# Altium PCB atmusic.PcbDoc
Units mm, origin at the board's own origin, x right, y up, seen from the top; angles counter-clockwise.
Board outline 15.8 x 26.78 mm, 2 copper layers (Top Layer, Bottom Layer); 11 components, 11 nets, 52 pads, 12 vias.
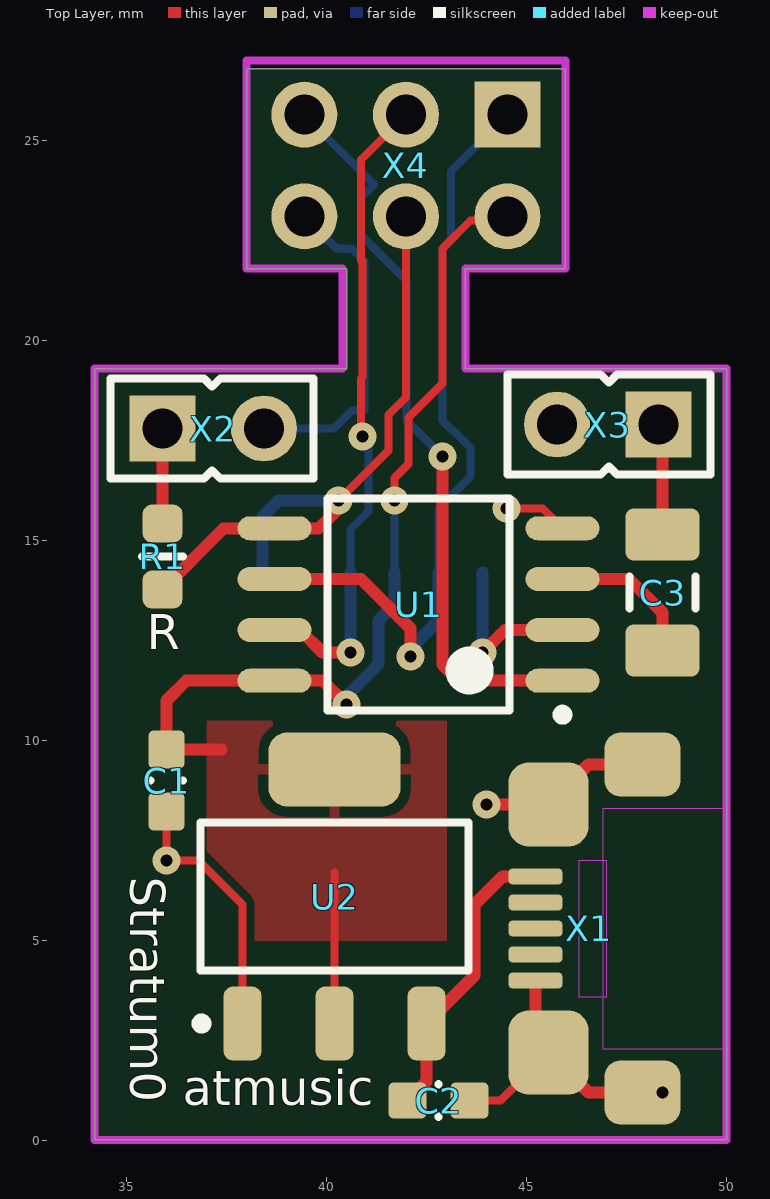
[diagram p0: Top Layer view]
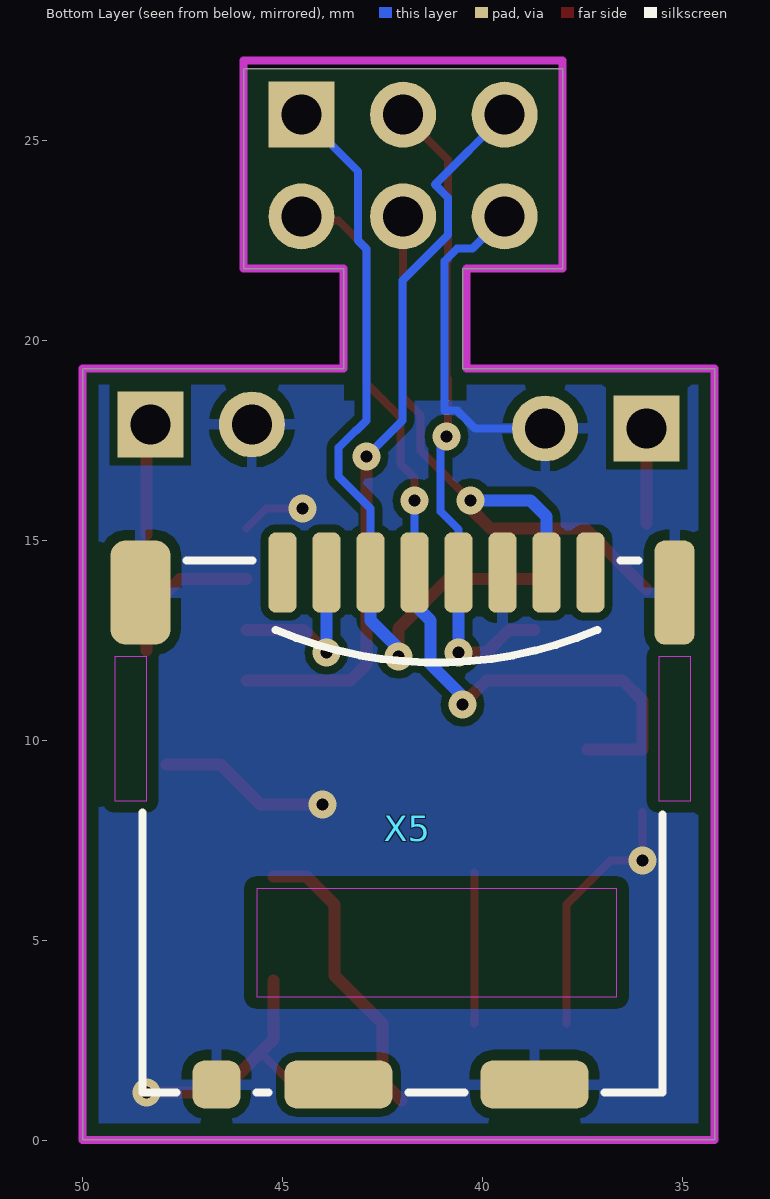
[diagram p1: Bottom Layer view, seen from below]

## Layer stack, top to bottom
Top Solder: solder mask 0.0102, Solder Resist, Dk 3.5
Top Layer: signal copper 0.0356
Dielectric1: dielectric 0.32, FR-4, Dk 4.8
Bottom Layer: signal copper 0.0356
Bottom Solder: solder mask 0.0102, Solder Resist, Dk 3.5

## Board outline
34.2,0.018 34.2,19.3 40.5,19.3 40.5,21.8 38,21.8 38,26.8 45.97,26.8 45.97,21.8 43.47,21.8 43.47,19.3 50,19.3 50,0.018

## Design rules (kind name [scope] priority, off if disabled: settings)
AcuteAngle [All] p1 off: minimum=6.00000000000000E+0001 checktracksonly=FALSE
Clearance Clearance_keepout [IsKeepout] p1: gap=0.3
Clearance [All] p2: gap=0.2
ComponentClearance [All] p1: gap=0.254 collisioncheckmode=3 verticalgap=0.01 showdistances=FALSE
FabricationTestPointUsage TestPointUsage [All] p1: valid=0 allowmultiple=FALSE
FabricationTestpoint Testpoint [All] p1: side=3 testpointundercomponent=TRUE minsize=1.016 maxsize=2.54 preferedsize=1.524 minholesize=0 maxholesize=1.016 preferedholesize=0.813 testpointgrid=0.025 allowsidetop=TRUE allowsidebottom=TRUE usegrid=TRUE gridtolerance=0
HoleSize [All] p1: absolutevalues=TRUE maxlimit=5 minlimit=0.3 maxpercent=80.000 minpercent=20.000
PolygonConnect PolygonConnect_4 [All vs IsNamedPolygon('TL_GND')] p1: connectstyle=Direct reliefconductorwidth=0.254 reliefentries=4 polygonreliefangle="90 Angle" airgapwidth=0.254
PolygonConnect PolygonConnect_3 [All vs IsNamedPolygon('TL_GND_COOLING')] p2: connectstyle=Direct reliefconductorwidth=0.254 reliefentries=4 polygonreliefangle="90 Angle" airgapwidth=0.254
PolygonConnect PolygonConnect_2 [All vs IsNamedPolygon('TL_GND_LDO5V')] p3: connectstyle=Direct reliefconductorwidth=0.254 reliefentries=4 polygonreliefangle="90 Angle" airgapwidth=0.254
PolygonConnect PolygonConnect_1 [All vs IsNamedPolygon('TL_GND_5Vow')] p4: connectstyle=Direct reliefconductorwidth=0.254 reliefentries=4 polygonreliefangle="90 Angle" airgapwidth=0.254
PolygonConnect PolygonConnect_VIA [All vs IsVIa] p5: connectstyle=Direct reliefconductorwidth=0.254 reliefentries=4 polygonreliefangle="90 Angle" airgapwidth=0.254
PolygonConnect [All] p6: connectstyle=Relief reliefconductorwidth=0.254 reliefentries=4 polygonreliefangle="90 Angle" airgapwidth=0.254
RoomDefinition atmusic [InComponentClass('atmusic')] p1: confinementstyle=ConfineOut formatcopy=TRUE lockcomponents=FALSE outline 51.12,1.52 60.32,1.52 60.32,11.72 51.12,11.72
RoutingVias [All] p1: holewidth=0.3 width=0.7 viastyle="Through Hole" minholewidth=0.3 minwidth=0.7 maxholewidth=0.5 maxwidth=0.9
SilkToSolderMaskClearance SilkscreenOverComponentPads [IsPad] p1: minsilkscreentomaskgap=0.254 clearancetoexposedcopper=TRUE
SolderMaskExpansion [All] p1: expansion=0.102
UnpouredPolygon [All] p1: allowunpoured=FALSE
Width [All] p1: maxlimit=0.5 minlimit=0.2 preferedwidth=0.3 minimp=50.000000 maximp=50.000000 favimp=50.000000
24 further rules are at their usual default settings.

## Components (designator, comment, footprint, x,y, rotation, side; value= is the part's Value field where it differs from the comment)
C1 "100n" CAPC1608X06N 36,9 r90 top
C2 "100n" CAPC1608X06N 42.8,1 r180 top
C3 "10u" CAPC3216X07N 48.4,13.7 r270 top
R1 "1k .. 47k" RESC1608X06N 35.9,14.6 r270 top
U1 "ATTINY 85" SOIC127P800X216-8N 42.3,13.4 r180 top
U2 "AMS1117-3.3" SOT230P700X180-4N 40.2,6.1 r90 top
X1 "ZX62R-B-5P" ZX62R-B-5P 47.9,5.3 r90 top
X2 "SL11-124_2_Z" Fischer_SL11-124_2_x 34.6,17.8 r0 top
X3 "SL11-124_2_Z" Fischer_SL11-124_2_x 49.6,17.9 r180 top
X4 "WSL 6G" WSL_6G 42,24.4 r180 top
X5 "DM3 microSD-CardHolder" DM3CS-SF 41.8,14.2 r0 bottom

## Footprints (in the part's own frame and the unit in brackets; to place one, negate y for a bottom-side part, rotate by r counter-clockwise, add the part's x,y. Pads: shape width x height; smd on the part's side, far side on the other; paste and mask are expansions set on the pad)
CAPC1608X06N [mm] "Chip Capacitor, 2-Leads, Body 1,6x0,8mm, IPC Medium Density"
  rrect30% 0.95x0.9 smd: 1(-0.775,0) 2(0.775,0)
  silkscreen extent 0,-0.41 0,0.41, body extent -0.85,-0.45 0.85,0.45, height 0.6
CAPC3216X07N [mm] "Chip Capacitor, 2-Leads, Body 3,2x1,6mm, IPC Medium Density"
  rrect30% 1.3x1.85 smd: 1(-1.45,0) 2(1.45,0)
  silkscreen extent -0.4,-0.82 0.4,0.82, body extent -1.7,-0.9 1.7,0.9, height 0.7
DM3CS-SF [mm] "DM3CS-SF, Hinge, Push -Pull microSD Card-Holder"
  rrect50% 0.7x2 smd: 1(3.2,0) 2(2.1,0) 3(1,0) 4(-0.1,0) 5(-1.2,0) 6(-2.3,0) 7(-3.4,0) 8(-4.5,0)
  rrect50% 2.7x1.2 smd: CD(1.8,12.8) COM(-3.1,12.8)
  rrect50% 1x2.6 smd: COM(-6.6,0.5)
  rrect50% 1.2x1.2 smd: COM(4.85,12.8)
  rrect50% 1.5x2.6 smd: COM(6.75,0.5)
  Top Layer keep-out region: 6.6,5.7 6.6,2.1 7.4,2.1 7.4,5.7
  Top Layer keep-out region: -7,5.7 -7,2.1 -6.2,2.1 -6.2,5.7
  Top Layer keep-out region: -5.15,10.6 -5.15,7.9 3.85,7.9 3.85,10.6
  silkscreen extent -6.3,-0.3 6.7,13, body extent -6.7,-2 7.1,13.42, height 17
Fischer_SL11-124_2_x [mm] "Präzisionssteckerleiste 2 polig"
  rect 1.65x1.65 hole 1: 1(1.295,0)
  round 1.65 hole 1: 2(3.835,0)
  silkscreen extent 0,-1.25 5.08,1.25, body extent 0,-1.25 5.08,1.25, height 9.4
RESC1608X06N [mm] "Chip Resistor, 2-Leads, Body 1,6x0,8mm, IPC Medium Density"
  rrect50% 0.95x1 smd: 1(-0.825,0) 2(0.825,0)
  silkscreen extent 0,-0.51 0,0.51, body extent -0.87,-0.48 0.87,0.47, height 0.65
SOIC127P800X216-8N [mm] "SOIC, 8-Leads, Body 5,3x5,4mm (max), Pitch 1,27mm, IPC Medium Density"
  oval 1.85x0.6 smd: 1(-3.6,1.905) 2(-3.6,0.635) 3(-3.6,-0.635) 4(-3.6,-1.905) 5(3.6,-1.905) 6(3.6,-0.635) 7(3.6,0.635) 8(3.6,1.905)
  silkscreen extent -3.73,-2.65 2.27,2.88, body extent -2.7,-2.68 2.7,2.68, height 2.16
SOT230P700X180-4N [mm] "SOT223, 4-Leads, Body 6,7x7,3mm (max), Pitch 2,30mm, IPC Medium Density"
  rrect50% 1.85x0.95 smd: 1(-3.175,2.3) 2(-3.175,0) 3(-3.175,-2.3)
  rrect50% 1.85x3.3 smd: 4(3.175,0)
  silkscreen extent -3.3,-3.35 1.85,3.45, body extent -1.85,-3.35 1.85,3.35, height 1.8
WSL_6G [mm] "Wannenstecker 6-polig, gerade 2,54mm"
  rect 1.65x1.65 hole 1: 1(-2.525,-1.245)
  round 1.65 hole 1: 2(-2.525,1.295) 3(0.015,-1.245) 4(0.015,1.295) 5(2.555,-1.245) 6(2.555,1.295)
  body extent -7.43,-4.26 7.37,4.48, height 9.13
ZX62R-B-5P [mm] "Micro-USB, SMT, Reverse"
  rrect50% 0.4x1.35 smd: 1(1.3,2.675) 2(0.65,2.675) 3(0,2.675) 4(-0.65,2.675) 5(-1.3,2.675)
  rrect50% 1.6x1.9 smd: SH(-4.1,0) SH(4.1,0)
  rrect50% 2.1x2 smd: SH(-3.1,2.35) SH(3.1,2.35)
  Top Layer keep-out region: -1.7,0.9 1.7,0.9 1.7,1.6 -1.7,1.6
  Top Layer keep-out region: -3,-2.1 3,-2.1 3,1 -3,1
  body extent -4.4,-2.75 4.4,2.98, height 2.71

## Part data
C1 C2: library part "X7R-G0603 100N", "100nF ±10% 0603 X7R Chip Capacitor, 16V"
C3: library part "X7R-G1206 10/25", "10uF ±10% 1206 X7R Chip Capacitor, 25V"
R1: library part "SMD R 0603", "1% 100mW 0603 Chip Resistor E12"
U1: library part "ATTINY 85-20 SU", "8-Bit Microcontroller with 8kBytes Flash"
U2: "Low cost fixed linear regulator"
X1: "Micro-USB, SMT, Reverse"
X2 X3: "Stiftleiste THT 2 reihig Rastermaß 2,54mm"
X4: "Wannenstecker, 6Pol, 2,54mm RM"
X5: library part DM3CS-SF, "DM3-Series microSD Memory-Card Hinge Connector (Push-Pull, no election)"

## Via types
v1: diameter 0.7, hole 0.3, Top Layer to Bottom Layer, 12 vias

## Nets (pads, with @x,y where several pads share a name; then routed paths per layer and width w, separated by ;. In a path a pad name is that pad's centre, name@x,y a point inside that pad or via, vN(x,y) a via of type N, cw(c..) or ccw(c..) an arc to the next point about the centre after c; other vN are vias at no path point)
3V3: C1.2 U1.8 U2.2 U2.4 X4.2 X5.4 | length 25.6
  Top Layer w0.2: U2.2 40.2,6.7 ; v1(41.7,16) 41.7,16.564 42.05,16.914 42.05,18.076 42.9,18.926 42.9,22.3 43.605,23.005 X4.2@44.525,23.005
  Top Layer w0.3: 37.375,9.775 C1.2 36,11 36.495,11.495 U1.8 39.905,11.495 v1(40.5,10.9)
  Bottom Layer w0.2: X5.4 v1(41.7,16)
  Bottom Layer w0.3: v1(40.5,10.9) 40.5,11.11 41.3,11.91 41.3,13 41.7,13.4 X5.4
5V: C2.2 U2.3 X1.1 | length 7.4
  Top Layer w0.3: C2.2 42.5,1.475 U2.3 43.7,4.125 43.7,5.9 44.4,6.6 X1.1
GND: C1.1 C2.1 U1.4 U2.1 X1.5 X1.SH X2.2 X3.2 X4.6 X5.6 X5.COM | length 28.6
  Top Layer w0.2: C1.1 v1(36,7) 36.8,7 37.9,5.9 U2.1 ; C2.1 44.35,1 X1.SH@45.55,2.2 ; v1(44.5,15.8) 45.405,15.8 U1.4
  Top Layer w0.3: v1(44,8.4) 45.55,8.4 46.55,9.4 X1.SH@47.9,9.4 ; X1.5 45.225,2.525 45.55,2.2 46.55,1.2 47.9,1.2 v1(48.4,1.2)
  Bottom Layer w0.2: X2.2 40.181,17.8 40.631,18.25 40.95,18.25 40.95,21.983 40.633,22.3 40.25,22.3 X4.6
NetC3_1: C3.1 X3.1 | length 2.8
  Top Layer w0.3: X3.1 48.4,17.805 C3.1
NetC3_2: C3.2 U1.3 | length 3.8
  Top Layer w0.3: U1.3 47.565,14.035 48.4,13.2 C3.2
NetR1_1: R1.1 X2.1 | length 2.4
  Top Layer w0.3: X2.1 35.9,17.795 R1.1
NetR1_2: R1.2 U1.5 X4.4 X5.7 | length 16.7
  Top Layer w0.2: v1(40.3,16) 41.55,17.25 41.55,18.142 41.985,18.577 X4.4
  Top Layer w0.3: R1.2 37.43,15.305 U1.5 39.805,15.305 40.3,15.8 v1(40.3,16)
  Bottom Layer w0.3: X5.7 38.4,15.6 38.8,16 v1(40.3,16)
NetU1_1: U1.1 X4.5 | length 18.6
  Top Layer w0.3: v1(42.9,17.1) 42.9,11.9 43.305,11.495 U1.1
  Bottom Layer w0.2: X4.5 41.19,23.9 40.86,23.571 40.86,22.639 42,21.499 42,18 v1(42.9,17.1)
NetU1_2: U1.2 X5.2 | length 4.2
  Top Layer w0.3: v1(43.9,12.2) 44.465,12.765 U1.2
  Bottom Layer w0.3: v1(43.9,12.2) X5.2
NetU1_6: U1.6 X4.1 X5.3 | length 19.8
  Top Layer w0.3: U1.6 40.865,14.035 42.1,12.8 v1(42.1,12.1)
  Bottom Layer w0.2: X5.3 42.8,15.8 43.6,16.6 43.6,17.319 43.169,17.75 43.15,17.75 42.9,18 42.9,22.289 43.11,22.499 43.11,24.23 X4.1
  Bottom Layer w0.3: v1(42.1,12.1) 42.1,12.3 42.8,13 X5.3
NetU1_7: U1.7 X4.3 X5.5 | length 16.3
  Top Layer w0.2: 40.86,22 40.86,24.52 X4.3 ; v1(40.9,17.6) 40.86,17.64 40.86,19.053 40.9,19.093 40.9,22
  Top Layer w0.3: U1.7 39.335,12.765 39.9,12.2 v1(40.6,12.2)
  Bottom Layer w0.2: X5.5 40.6,15.281 41.05,15.731 41.05,17.45 v1(40.9,17.6)
  Bottom Layer w0.3: v1(40.6,12.2) X5.5
pads on no net: X1.2 X1.3 X1.4 X5.1 X5.8 X5.CD

## Polygon pours and split planes (outlines as drawn)
GND on Bottom Layer "BL_GND" (solid, remove dead copper, pour order 2): 34.2,0.018 50,0.018 50,19.3 43.47,19.3 43.47,18.5 40.4,18.5 40.4,19.3 34.2,19.3
3V3 on Top Layer "TL_3v3" (solid, remove dead copper, pour order 4): 37,10.5 37,5 43,5 43,10.5

## Keep-outs
Keep-Out Layer:
  lines w0.2: 34.2,0.018 34.2,19.3 40.4,19.3 40.4,21.8 38,21.8 38,27 45.97,27 45.97,21.8 43.47,21.8 43.47,19.3 50,19.3 50,0.018 34.2,0.018

## Silkscreen, mask and mechanical layers (free items; w line width, h text height)
Top Overlay:
  text "R" at 35.5,12 h1.5
  text "Stratum0" at 34.8,6.6 h1.5 r270
  text "atmusic" at 36.4,0.6 h1.5
Mechanical 1:
  lines w0.2: 34.2,0.018 34.2,19.3 40.4,19.3 40.4,21.8 38,21.8 38,27 45.97,27 45.97,21.8 43.47,21.8 43.47,19.3 50,19.3 50,0.018 34.2,0.018
Mechanical 16:
  lines w0.127: -125.1,-29.415 -120.02,-29.415 ; -125.1,41.07 -120.02,41.07 ; -125.1,111.555 -120.02,111.555 ; -75.824,-99.9 -75.824,-94.82 ; -75.824,176.96 -75.824,182.04 ; -26.675,-99.9 -26.675,-94.82 ; -26.675,176.96 -26.675,182.04 ; 22.474,-99.9 22.474,-94.82 ; 22.474,176.96 22.474,182.04 ; 71.75,-99.9 71.75,-94.82 ; 71.75,176.96 71.75,182.04 ; 113.66,-94.82 149.22,-94.82 ; 120.899,-99.9 120.899,-94.82 ; 120.899,176.96 120.899,182.04 ; 149.22,-87.2 263.52,-87.2 ; 149.22,-79.58 263.52,-79.58 ; 149.22,-71.96 187.32,-71.96 ; 170.048,-99.9 170.048,-94.82 ; 170.048,176.96 170.048,182.04 ; 187.32,-94.82 187.32,-79.58 187.32,-64.34 ; 219.324,-99.9 219.324,-94.82 ; 219.324,176.96 219.324,182.04 ; 240.66,-94.82 240.66,-79.58 ; 263.52,-29.415 268.6,-29.415 ; 263.52,41.07 268.6,41.07 ; 263.52,111.555 268.6,111.555 ; 149.22,-94.82 149.22,-64.34 187.32,-64.34 ; 149.22,-94.82 263.52,-94.82 ; 187.32,-64.34 263.52,-64.34 263.52,-94.82 ; 263.52,-94.82 263.52,176.96 -120.02,176.96 -120.02,-94.82 263.52,-94.82 ; -125.1,-99.9 268.6,-99.9 268.6,182.04 -125.1,182.04 -125.1,-99.9
  text "1" at -101.063,178.611 h1.78
  text "2" at -52.024,178.611 h1.78
  text "3" at -2.765,178.611 h1.78
  text "4" at 46.528,178.611 h1.78
  text "5" at 95.804,178.611 h1.78
  text "6" at 144.826,178.611 h1.78
  text "7" at 194.356,178.611 h1.78
  text "8" at 243.378,178.611 h1.78
  text "A" at -123.195,144.626 h1.78
  text "A" at 265.425,144.626 h1.78
  text "B" at -123.195,74.014 h1.78
  text "B" at 265.425,74.014 h1.78
  text "C" at -123.195,3.402 h1.78
  text "C" at 265.425,3.402 h1.78
  text "D" at -123.195,-66.702 h1.78
  text "D" at 265.425,-66.702 h1.78
  text "ENGINEER:" at 150.49,-66.88 h1.14
  text "TITLE:" at 188.59,-66.88 h1.14
  text "atmusic" at 193.9,-69 h2.5
  text "Kasalehlia, Chrissi^" at 160.3,-69.2 h2.5
  text "PCB DESIGNER:" at 150.49,-74.373 h1.14
  text "DATE:" at 150.49,-82.12 h1.14
  text "PART NO.:" at 188.59,-82.12 h1.14
  text "REV:" at 241.93,-82.12 h1.14
  text "V1" at 250.8,-83.8 h2.5
  text ".PRINT_DATE" at 151.76,-85.168 h1.78
  text "FILE NAME:" at 150.49,-89.74 h1.14
  text "DWG NO:" at 188.59,-89.74 h1.14
  text "SCALE:" at 241.93,-89.74 h1.14
  text ".PCB_FILE_NAME_NO_PATH" at 151.76,-92.788 h1.78
  text "1" at -101.063,-98.249 h1.78
  text "2" at -52.024,-98.249 h1.78
  text "3" at -2.765,-98.249 h1.78
  text "4" at 46.528,-98.249 h1.78
  text "5" at 95.804,-98.249 h1.78
  text "6" at 144.826,-98.249 h1.78
  text "7" at 194.356,-98.249 h1.78
  text "8" at 243.378,-98.249 h1.78

## Text inside footprints (layer, text, board x,y; h text height)
X1: Mechanical 10 "PCB Edge" at 49.9,3.2 h0.6 r90